# Altium PCB TSI_SAMP_SAMI_V3.4.PcbDoc (part 4 of 5)
Units mm, origin at the board's own origin, x right, y up, seen from the top; angles counter-clockwise.
Board outline 189 x 127.41 mm, 4 copper layers (Top Layer, GROUND, POWER, Bottom Layer), stack 1.56 mm thick; 227 components, 161 nets, 868 pads, 584 vias.
Unrouted connection lines stored in the file: 18.
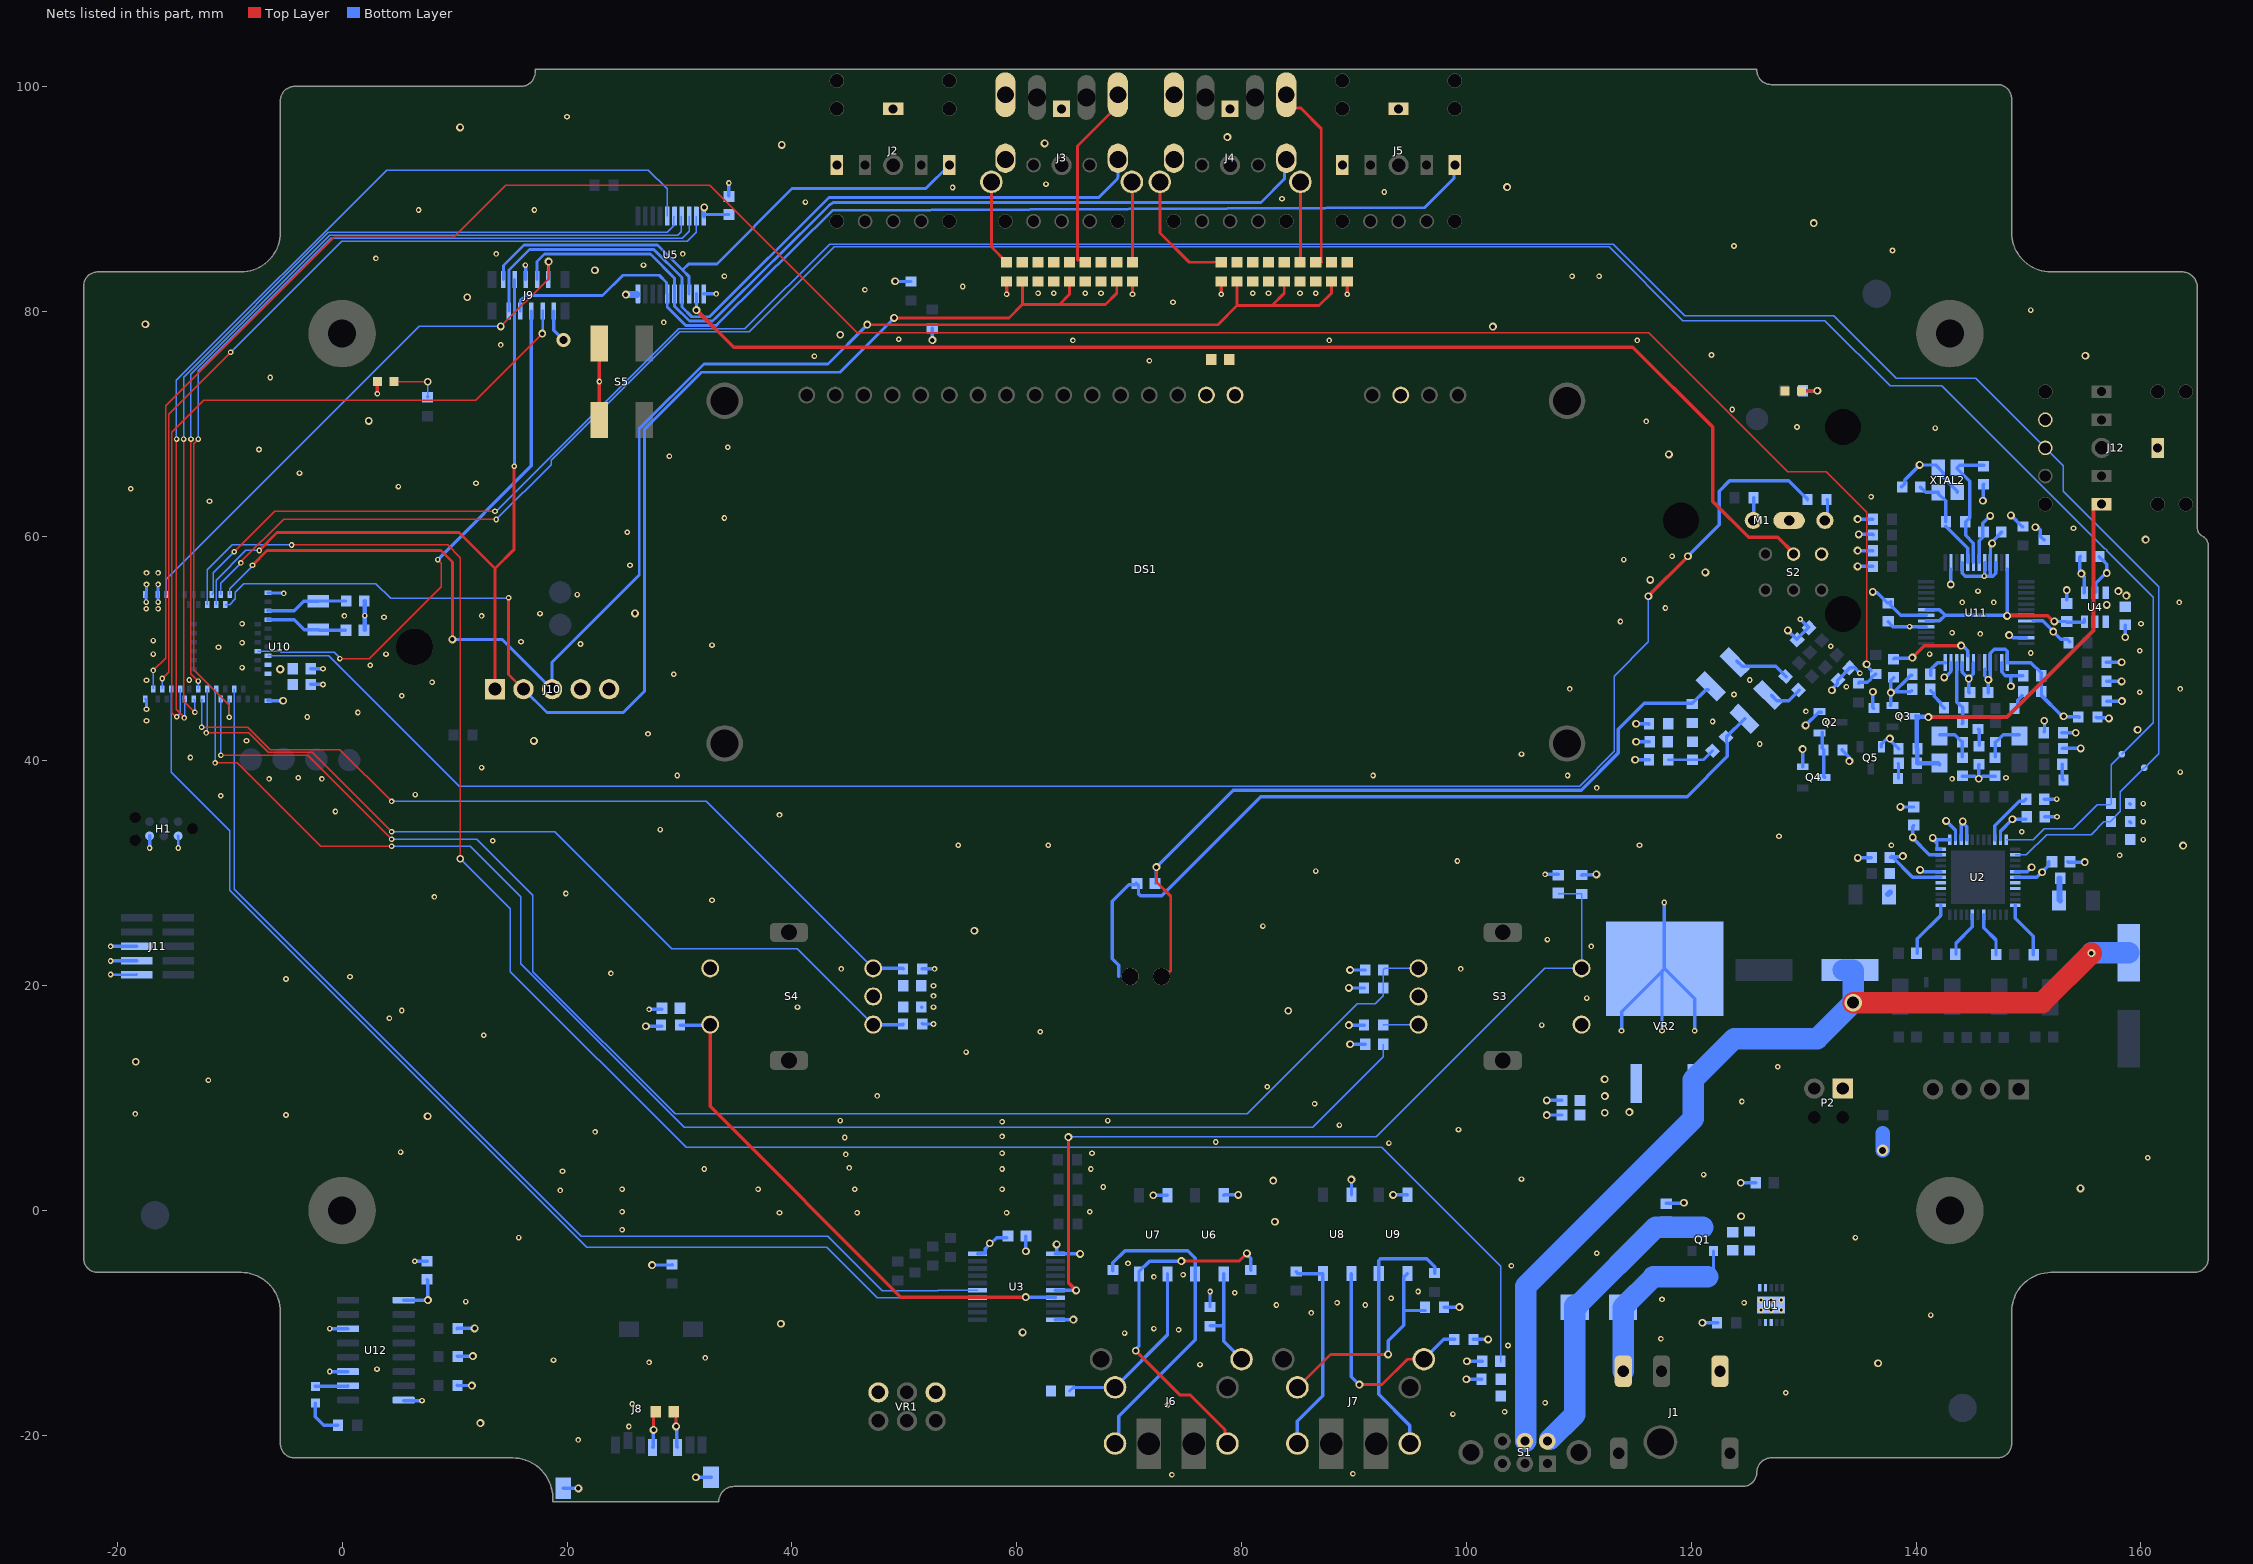
[diagram p4: the nets of this part, all layers, seen from the top]

## Via types
v1: diameter 0.5, hole 0.25, Top Layer to Bottom Layer, tented both sides, 372 vias
v2: diameter 0.7, hole 0.4, Top Layer to Bottom Layer, tented both sides, 201 vias
v3: diameter 1.575, hole 1.067, Top Layer to Bottom Layer, tented both sides, 4 vias
v4: diameter 1.27, hole 0.711, Top Layer to Bottom Layer, tented both sides, 3 vias
v5: diameter 1.016, hole 0.635, Top Layer to Bottom Layer, tented both sides, 2 vias
v6: diameter 0.762, hole 0.381, Top Layer to Bottom Layer, tented both sides, 1 vias
v7: diameter 0.7/0.7 (per signal layer), hole 0.4, Top Layer to Bottom Layer, tented both sides, 1 vias

## Nets (pads, with @x,y where several pads share a name; then routed paths per layer and width w, separated by ;. In a path a pad name is that pad's centre, name@x,y a point inside that pad or via, vN(x,y) a via of type N, cw(c..) or ccw(c..) an arc to the next point about the centre after c; other vN are vias at no path point) (continued)
NetJ6_1B: (continued)
  Top Layer w0.254: v2(70.586,-12.462) 74.543,-16.419 75.444,-16.419 78.526,-19.5 78.526,-20.5 J6.1B@78.749,-20.722 ; v2(74.65,-4.499) 79.781,-4.499 v2(80.48,-3.801)
  Bottom Layer w0.305: v2(70.586,-12.462) 70.586,-12.342 70.874,-12.054 70.874,-5.435 71.81,-4.499 v2(74.65,-4.499) ; v2(80.48,-3.801) 80.48,-3.922 80.81,-4.252 R17.2@80.81,-5.312
NetJ6_5A: J6.5A R33.2 U6.4 | length 9.5
  Bottom Layer w0.305: R33.2@77.194,-10.25 78.269,-10.25 78.414,-10.104 ; U6.4@78.414,-5.635 78.414,-10.104 ; J6.5A@79.999,-13.222 78.414,-11.638 78.414,-10.104
NetJ6_5B: J6.5B R29.2 U7.4 | length 16.2
  Bottom Layer w0.254: R29.2@64.706,-16.044 65.027,-15.722 J6.5B@68.749,-15.722
  Bottom Layer w0.305: J6.5B@68.749,-15.722 73.414,-11.057 U7.4@73.414,-5.635
NetJ7_1A: J7.1A R18.2 U8.6 | length 18.5
  Bottom Layer w0.305: R18.2@84.861,-5.439 85.023,-5.601 U8.6@87.236,-5.601 87.236,-16.476 84.967,-18.745 J7.1A@84.967,-20.722
NetJ7_1B: J7.1B R19.2 U9.6 | length 23.3
  Bottom Layer w0.305: J7.1B@94.967,-20.722 94.967,-19.113 92.206,-16.353 U9.6@92.206,-5.601 92.206,-4.445 92.355,-4.296 96.482,-4.296 97.167,-4.982 R19.2@97.167,-5.592
NetJ7_5A: J7.5A R35.2 U8.4 | length 20.3
  Top Layer w0.254: v2(90.475,-15.472) 92.507,-15.472 94.756,-13.222 J7.5A@96.217,-13.222
  Bottom Layer w0.305: U8.4@89.776,-5.601 89.763,-5.613 89.763,-14.761 v2(90.475,-15.472) ; J7.5A@96.217,-13.222 97.98,-11.459 R35.2@98.958,-11.459
NetJ7_5B: J7.5B R31.2 U9.4 | length 19.1
  Top Layer w0.254: J7.5B@84.967,-15.722 87.896,-12.792 v2(93.04,-12.792)
  Bottom Layer w0.254: 94.423,-8.901 94.443,-8.881 R31.2@96.355,-8.881
  Bottom Layer w0.305: v2(93.04,-12.792) 93.04,-11.573 94.423,-10.19 94.423,-8.901 94.423,-5.924 U9.4@94.746,-5.601
NetM1_1: M1.1 R71.2 | length 1.9
  Bottom Layer w0.305: R71.2@132.091,63.246 132.116,63.221 132.116,61.413 M1.1@132.142,61.388
NetM1_3: M1.3 R73.2 | length 1.8
  Bottom Layer w0.305: M1.3@125.5,61.627 125.55,61.677 R73.2@125.55,63.4
NetQ2_1: Q2.1 Q4.3 R60.1 | length 4.1
  Bottom Layer w0.305: Q2.1@131.653,42.535 131.653,41.127 131.8,40.979 131.8,38.593 Q4.3@131.861,38.532